# Altium PCB fab.PcbDoc
Units mm, origin at the board's own origin, x right, y up, seen from the top; angles counter-clockwise.
Board outline 43 x 16.25 mm, 2 copper layers (Top Layer, Bottom Layer); 20 components, 19 nets, 93 pads, 14 vias.
Unrouted connection lines stored in the file: 2.
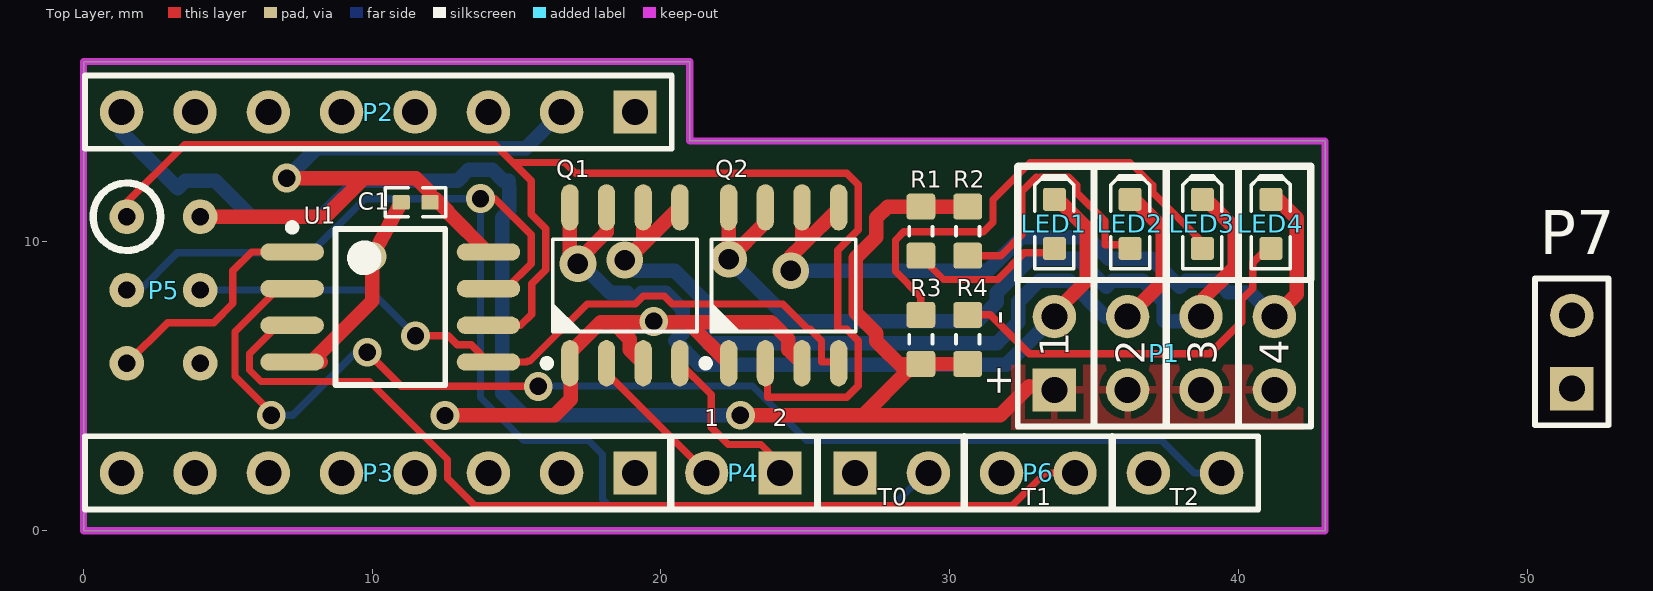
[diagram p0: Top Layer view]
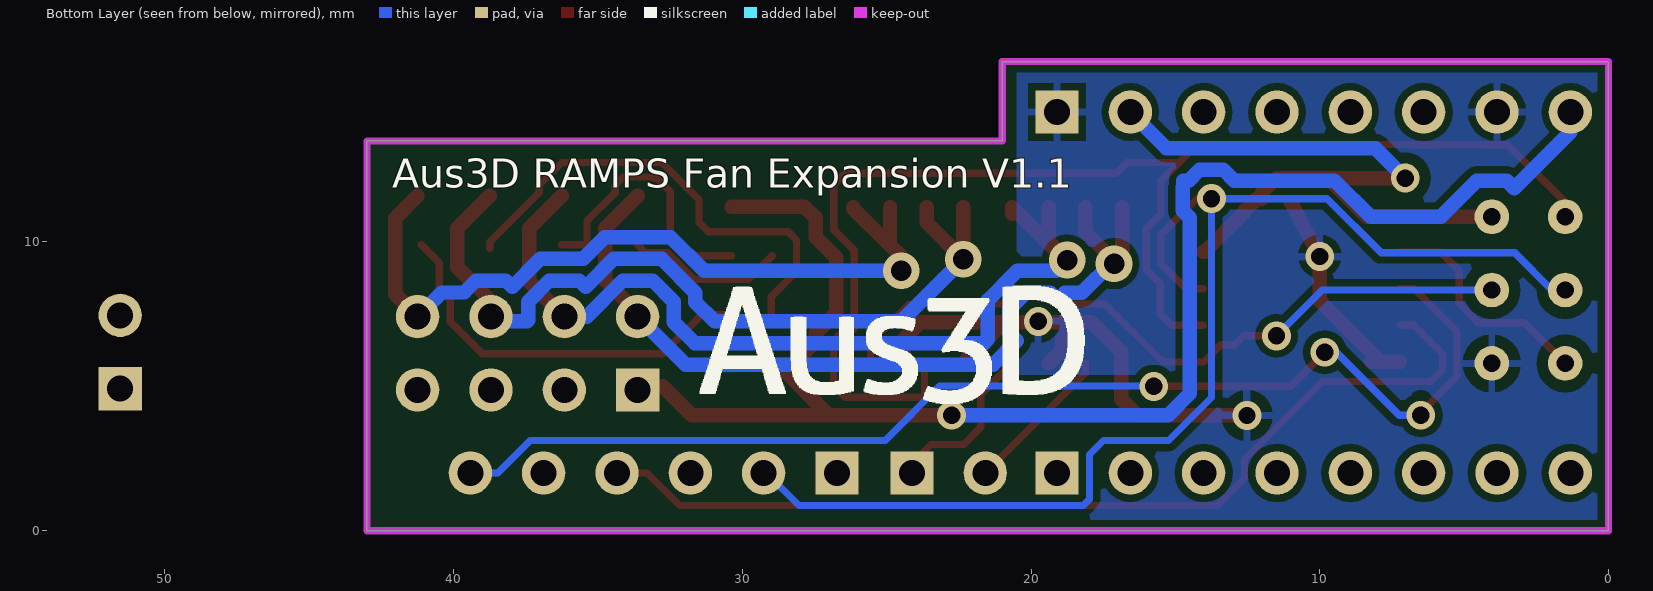
[diagram p1: Bottom Layer view, seen from below]
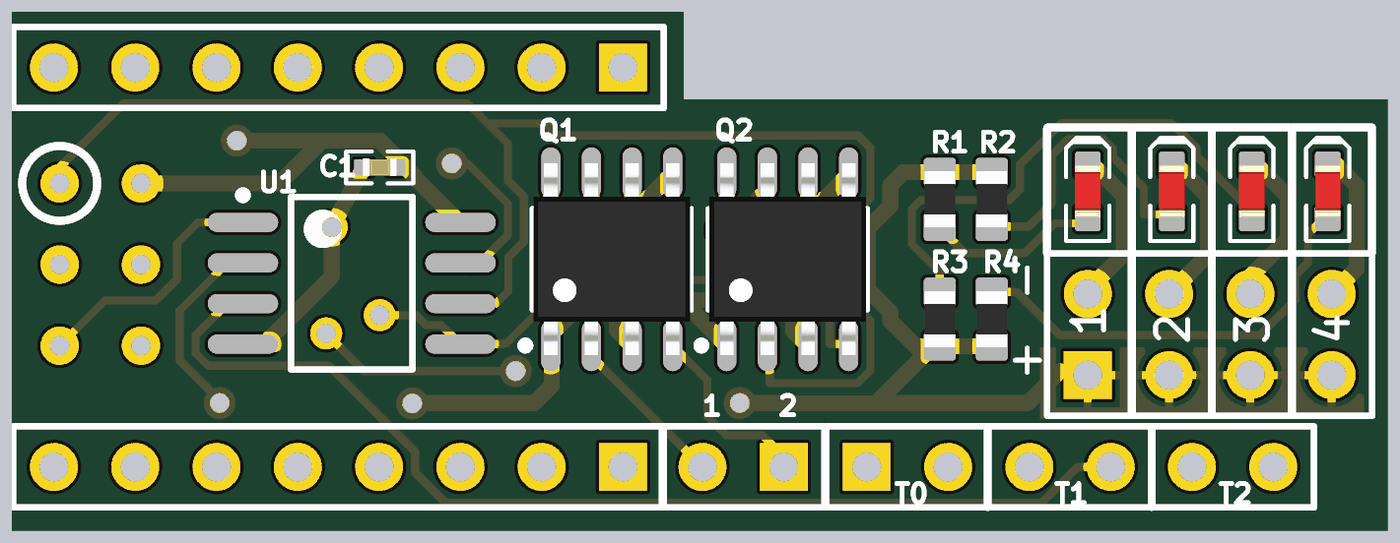
[diagram p2: 3D render of the assembled board from above, using the file's embedded part models]

## Layer stack, top to bottom
Top Solder: solder mask 0.0102, Solder Resist, Dk 3.5
Top Layer: signal copper 0.0356
Dielectric1: dielectric 0.32, FR-4, Dk 4.8
Bottom Layer: signal copper 0.0356
Bottom Solder: solder mask 0.0102, Solder Resist, Dk 3.5

## Board outline
0,0 43,0 43,13.5 21,13.5 21,16.25 0,16.25

## Design rules (kind name [scope] priority, off if disabled: settings)
Clearance [All] p1: gap=0.25
ComponentClearance [All] p1: gap=0.25 collisioncheckmode=3 verticalgap=0.254 showdistances=FALSE
FabricationTestPointUsage TestPointUsage [All] p1: valid=0 allowmultiple=FALSE
FabricationTestpoint Testpoint [All] p1: side=3 testpointundercomponent=TRUE minsize=1.016 maxsize=2.54 preferedsize=1.524 minholesize=0 maxholesize=1.016 preferedholesize=0.813 testpointgrid=0.025 allowsidetop=TRUE allowsidebottom=TRUE usegrid=TRUE gridtolerance=0
PolygonConnect [All] p1: connectstyle=Relief reliefconductorwidth=0.25 reliefentries=4 polygonreliefangle="90 Angle" airgapwidth=0.25
RoutingVias [All] p1: holewidth=0.6 width=1 viastyle="Through Hole" minholewidth=0.6 minwidth=1 maxholewidth=0.6 maxwidth=1
SilkToSolderMaskClearance SilkscreenOverComponentPads [IsPad] p1: minsilkscreentomaskgap=0.254 clearancetoexposedcopper=TRUE
SolderMaskExpansion [All] p1: expansion=0.102
Width Width_Power [(InNet('5V') OR InNet('12V') OR InNet('GND') OR InNet('FAN1') OR InNet('FAN2') OR InNet('FAN3') OR InNet('FAN4'))] p1: maxlimit=0.5 minlimit=0.5 preferedwidth=0.5
Width [All] p2: maxlimit=0.254 minlimit=0.254 preferedwidth=0.254
26 further rules are at their usual default settings.

## Components (designator, comment, footprint, x,y, rotation, side; value= is the part's Value field where it differs from the comment)
C1 "100n" CAPC1005X55N 11.5,11.375 r0 top
LED1 "Red" LED-0603-RED 33.625,10.625 r90 top
LED2 "Red" LED-0603-RED 36.25,10.625 r90 top
LED3 "Red" LED-0603-RED 38.75,10.625 r90 top
LED4 "Red" LED-0603-RED 41.125,10.625 r90 top
P1 "Fans" HDR2X4 33.625,4.875 r0 top
P2 "Header 8" HDR1X8 19.1,14.5 r180 top
P3 "Header 8" HDR1X8 19.1,2 r180 top
P4 "Header 2" HDR1X2 24.125,2 r180 top
P5 "ICSP" "ICSP Pads" 1.5,10.875 r0 top
P6 "Thermistor Pins" HDR1X6 26.72,2 r0 top
P7 "12V AUX" HDR1X2 51.547,4.921 r90 top
Q1 "MOSFET_AO4818B" SOIC127P600X175-8AN 18.75,8.5 r90 top
Q2 "MOSFET_AO4818B" SOIC127P600X175-8AN 24.25,8.5 r90 top
R1 "Thick Film" RESC1608X55N 29,10.375 r270 top
R2 "Thick Film" RESC1608X55N 30.625,10.375 r270 top
R3 "Thick Film" RESC1608X55N 29,6.625 r90 top
R4 "Thick Film" RESC1608X55N 30.625,6.625 r90 top
U1 "ATtiny45-20SU" 8S2_N 10.625,7.75 r0 top
? "Comment" AUS3D-LOGO-BACK 25.125,6.25 r0 top

## Footprints (in the part's own frame and the unit in brackets; to place one, negate y for a bottom-side part, rotate by r counter-clockwise, add the part's x,y. Pads: shape width x height; smd on the part's side, far side on the other; paste and mask are expansions set on the pad)
8S2_N [mm] "SOP, 8-Leads, Body 5.3x5.3mm, Pitch 1.27mm, IPC Medium Density"
  oval 2.2x0.6 smd: 1(-3.4,1.905) 2(-3.4,0.635) 3(-3.4,-0.635) 4(-3.4,-1.905) 5(3.4,-1.905) 6(3.4,-0.635) 7(3.4,0.635) 8(3.4,1.905)
  silkscreen extent -3.52,-2.7 1.9,2.88, body extent -2.7,-2.68 2.7,2.68, height 2.16
AUS3D-LOGO-BACK [mm]
CAPC1005X55N [mm] "Chip Capacitor, Body 1.0x0.5mm, EIA 0402, IPC Medium Density"
  round 0.2 on Mech15: 0(0,0)
  rrect20% 0.6x0.5 smd: 1(-0.5,0) 2(0.5,0)
  Top Layer pour cut-out: -0.325,0.375 -0.2,0.5 0.2,0.5 0.325,0.375 0.325,-0.375 0.2,-0.5 -0.2,-0.5 -0.325,-0.375
  silkscreen extent -1.05,-0.5 1.05,0.5, body extent -0.52,-0.27 0.53,0.28, height 0.55
HDR1X2 [mm] "Connector; Header; 2 Position"
  rect 1.5x1.5 hole 0.9: 1(0,0)
  round 1.5 hole 0.9: 2(2.54,0)
  silkscreen extent -1.27,-1.27 3.81,1.27
HDR1X6 [mm] "Connector; Header; 6 Position"
  rect 1.5x1.5 hole 0.9: 1(0,0)
  round 1.5 hole 0.9: 2(2.54,0) 3(5.08,0) 4(7.62,0) 5(10.16,0) 6(12.7,0)
  silkscreen extent -1.27,-1.27 13.97,1.27
HDR1X8 [mm] "Connector; Header; 8 Position"
  rect 1.5x1.5 hole 0.9: 1(0,0)
  round 1.5 hole 0.9: 2(2.54,0) 3(5.08,0) 4(7.62,0) 5(10.16,0) 6(12.7,0) 7(15.24,0) 8(17.78,0)
  silkscreen extent -1.27,-1.27 19.05,1.27
HDR2X4 [mm] "Connector; Header; 4x2 Position"
  rect 1.5x1.5 hole 0.9: 1(0,0)
  round 1.5 hole 0.9: 2(0,2.54) 3(2.54,0) 4(2.54,2.54) 5(5.08,0) 6(5.08,2.54) 7(7.62,0) 8(7.62,2.54)
  silkscreen extent -1.27,-1.27 8.89,3.81
"ICSP Pads" [mm]
  round 1.2 hole 0.6: 0(0,0) 1(2.54,0) 2(0,-2.54) 3(2.54,-2.54) 4(0,-5.08) 5(2.54,-5.08)
  silkscreen extent -1.17,-1.17 1.17,1.17
LED-0603-RED [mm]
  round 0.254 on Mech15: 0(0,0)
  rrect25% 0.8x0.8 smd: A(-0.85,0) K(0.85,0)
  Top Layer pour cut-out: -0.5,0.5 0.5,0.5 0.5,-0.5 -0.5,-0.5
  silkscreen extent -1.55,-0.67 1.68,0.67, body extent -0.8,-0.4 0.8,0.4, height 0.75
RESC1608X55N [mm] "Chip Resistor, Body 1.6x0.8mm, EIA 0603, IPC Medium Density"
  round 0.254 on Mech15: 0(0,0)
  rrect25% 0.9x1 smd: 1(-0.85,0) 2(0.85,0)
  Top Layer pour cut-out: -0.6,0.5 -0.4,0.7 0.4,0.7 0.6,0.5 0.6,-0.5 0.4,-0.7 -0.4,-0.7 -0.6,-0.5
  silkscreen extent -0.15,-0.41 0.15,0.41, body extent -0.87,-0.47 0.88,0.48, height 0.54
SOIC127P600X175-8AN [mm] "SOIC, 8-Leads, Body 4.9x3.9mm, Pitch 1.27mm, IPC Medium Density"
  round 1 on Mech15: 0(0,0)
  oval 1.6x0.6 smd: 1(-2.7,1.905) 2(-2.7,0.635) 3(-2.7,-0.635) 4(-2.7,-1.905) 5(2.7,-1.905) 6(2.7,-0.635) 7(2.7,0.635) 8(2.7,1.905)
  silkscreen extent -2.82,-2.5 1.6,2.82, body extent -3,-2.45 3,2.45, height 1.75

## Part data
C1: library part CAPC_100n_0402_X5R_16V_10%, "Capacitor SMD Cer 100nF 10% 16V X5R 0402"
LED1 LED2 LED3 LED4: library part LED_SMD_Red_0603_220mcd, "LED 0603 SMD Hyper Red 630nm 220mcd 20mA"
P1: library part "Header 4X2", "Header, 4-Pin, Dual row"
P2 P3: "Header, 8-Pin"
P4: "Header, 2-Pin"
P5: library part "Header 3X2", "Header, 3-Pin, Dual row"
P6: library part "Header 6", "Header, 6-Pin"
P7: library part "Header 2", "Header, 2-Pin"
Q1 Q2: "MOSFET Dual-Channel 30V 8.5A SOIC-8 SMD"
R1 R2 R3 R4: library part RES_330R_0603_5%, "Resistor SMD chip 330 Ohm 0.1W 5% 0603"
U1: "8-bit AVR Microcontroller, 20MHz, 2.7-5.5V, 4K Flash, 256 Bytes EEPROM, 256 Bytes SRAM, Industrial Grade (-40°C to 85°C), 8-Lead SOIC, Pb-Free"

## Via types
v1: diameter 1, hole 0.6, Top Layer to Bottom Layer, tented both sides, 7 vias
v2: diameter 1.27, hole 0.711, Top Layer to Bottom Layer, 4 vias
v3: diameter 1, hole 0.6, Top Layer to Bottom Layer, 3 vias

## Nets (pads, with @x,y where several pads share a name; then routed paths per layer and width w, separated by ;. In a path a pad name is that pad's centre, name@x,y a point inside that pad or via, vN(x,y) a via of type N, cw(c..) or ccw(c..) an arc to the next point about the centre after c; other vN are vias at no path point)
5V: C1.2 P2.2 P5.1 U1.8 | length 25
  Top Layer w0.5: P5.1@3.915,10.875 8.375,10.875 9.713,12.213 ; v1(7.037,12.213) 9.713,12.213 ; U1.8 13.99,9.655 12.615,11.03 12.615,11.065 12.18,11.5 12,11.5 12,11.728 11.515,12.213 9.713,12.213
  Bottom Layer w0.5: v1(7.037,12.213) 8.074,13.25 15.31,13.25 P2.2
12V: P1.1 P1.3 P1.5 P1.7 P2.8 P7.1 R1.1 R2.1 R3.1 R4.1 | length 56.5
  Top Layer w0.5: v1(22.75,4) 24.341,4 24.345,3.996 27,3.996 ; 28.25,5.775 R4.1@30.375,5.775 ; R2.1@30.375,11.225 27.85,11.225 27.459,10.834 27.459,10.16 26.75,9.451 26.75,7.549 27.459,6.84 27.459,6.566 28.512,5.512 27,4 31.75,4 32.75,5
  Bottom Layer w0.5: P2.8 1.32,13.805 3.261,11.864 3.522,12.125 4.558,12.125 5.808,10.875 8.238,10.875 9.49,12.127 12.963,12.127 13.336,12.5 14.164,12.5 14.537,12.127 14.728,12.127 14.728,11.936 14.75,11.914 14.75,11.086 14.499,10.834 14.499,4.751 15.25,4 16.164,4 v1(22.75,4)
FAN1: LED1.K P1.2 Q1.7 Q1.8 | length 29.4
  Top Layer w0.5: v2@16.845,9.28 Q1.8 ; v2(17.125,9.25) 17.125,9.355 18.115,10.345 Q1.7 ; P1.2 33.625,7.54 34.75,8.665 34.75,10.475 LED1.K@33.625,11.6
  Bottom Layer w0.5: v2(17.125,9.25) 17.125,9.355 18.24,8.24 18.824,8.24 19.075,7.989 19.336,8.25 20.164,8.25 20.75,7.664 20.75,6.836 20.489,6.575 21.315,5.75 31.96,5.75 P1.2
FAN1_PWM: P4.2 Q1.2 | length 5.2
  Top Layer w0.254: Q1.2 18.115,5.47 P4.2
FAN2: LED2.K P1.4 Q1.5 Q1.6 | length 31.4
  Top Layer w0.5: Q1.6 19.385,10.01 v2(18.75,9.375) 18.83,9.375 Q1.5 Q1.5@20.655,10.97 ; P1.4 37.375,8.625 37.375,10.475 LED2.K@36.25,11.6
  Bottom Layer w0.5: v2(18.75,9.375) 19.125,9 20.475,9 21.5,7.975 21.5,6.625 21.625,6.5 31.649,6.5 32.375,7.226 32.375,7.933 33.107,8.665 34.143,8.665 35.393,7.415 P1.4
FAN2_PWM: P4.1 Q1.4 | length 5.9
  Top Layer w0.254: Q1.4 21.738,4.717 21.738,3.581 22.331,2.988 23.467,2.988 24.125,2.33 P4.1
FAN3: LED3.K P1.6 Q2.7 Q2.8 | length 29.1
  Top Layer w0.5: Q2.8 v2(22.345,9.405) 23.615,10.675 Q2.7 ; P1.6 38.705,7.955 39.875,9.125 39.875,10.475 LED3.K@38.75,11.6
  Bottom Layer w0.5: v2(22.345,9.405) 24.5,7.25 30.96,7.25 31.625,7.915 31.625,8.243 32.797,9.415 34.453,9.415 35.425,8.443 35.647,8.665 36.683,8.665 37.415,7.933 37.415,7.291 37.456,7.25 38.54,7.25 P1.6
FAN3_PWM: P5.0 Q2.2 U1.6 | length 47
  Top Layer w0.254: P5.0@1.375,10.875 1.375,11.25 3.498,13.373 4.327,13.373 4.329,13.375 5.931,13.375 5.933,13.373 6.867,13.373 6.869,13.375 8.471,13.375 8.473,13.373 9.407,13.373 9.409,13.375 11.011,13.375 11.013,13.373 11.947,13.373 11.949,13.375 13.551,13.375 13.553,13.373 14.252,13.373 15.504,12.121 15.504,10.959 16.006,10.457 16.006,9.043 15.52,8.557 15.52,7.5 15.135,7.115 U1.6 ; 14.873,12.752 16.663,12.752 17.038,12.377 26.435,12.377 26.832,11.98 26.832,10.42 26.123,9.711 26.123,7.015 26.161,6.977 26.435,6.977 26.832,6.58 26.832,5.02 26.435,4.623 25.875,4.623 25.871,4.627 25.169,4.627 25.165,4.623 24.605,4.623 24.601,4.627 23.688,4.627 Q2.2@23.688,5.727
FAN4: LED4.K P1.8 Q2.5 Q2.6 | length 27.6
  Top Layer w0.5: v2(24.5,9) 24.5,9.5 24.885,9.885 ; Q2.6 24.885,9.885 ; Q2.5 26.155,11.155 24.885,9.885 ; P1.8 42.025,8.195 42.025,10.825 LED4.K@41.25,11.6
  Bottom Layer w0.5: v2(24.5,9) 31.321,9 32.486,10.165 34.764,10.165 35.514,9.415 36.993,9.415 37.965,8.443 38.187,8.665 39.223,8.665 39.638,8.25 40.41,8.25 P1.8
FAN4_PWM: P5.3 Q2.4 U1.5 | length 25.5
  Top Layer w0.254: v3(11.5,6.75) 12.633,6.75 12.945,6.438 13.432,6.438 U1.5 15.355,5.845 15.387,5.877 15.465,5.877 17.442,7.855 19.114,7.855 19.387,8.127 20.113,8.127 20.386,7.855 24.214,7.855 25.092,6.977 25.165,6.977 25.562,6.58 25.562,5.845 26.11,5.845 Q2.4
  Bottom Layer w0.254: P5.3 9.915,8.335 v3(11.5,6.75)
GND: C1.1 P2.1 P2.7 P5.5 P7.2 Q1.1 Q1.3 Q2.1 Q2.3 U1.4 | length 27.7
  Top Layer w0.5: U1.4@8.22,5.845 U1.4 7.886,5.845 10,7.959 v3(10,9.5) C1.1 ; v1(12.517,3.988) 12.512,3.988 12.5,4 16.323,4 16.875,4.552 16.875,6.191 17.911,7.228 18.319,7.228 ; Q1.3 18.915,6.27 18.915,6.631 18.319,7.228 ; Q2.1 20.918,7.228 ; Q2.3 24.415,6.27 24.415,6.631 23.819,7.228 20.918,7.228 ; 18.319,7.228 20.918,7.228
  other v1: 19.75,7.25
NetLED1_A: LED1.A R1.2 | length 5.5
  Top Layer w0.254: R1.2@28.958,9.525 29.785,8.698 31.661,8.698 32.588,9.625 33.35,9.625 LED1.A@33.625,9.9
NetLED2_A: LED2.A R2.2 | length 9.5
  Top Layer w0.254: R2.2@30.375,9.525 31.775,9.525 32.5,10.25 32.5,11.75 33.002,12.252 33.025,12.252 33.076,12.201 33.127,12.252 34.123,12.252 34.402,11.973 34.402,11.71 35.377,10.735 35.377,9.9 LED2.A@36.25,9.9
NetLED3_A: LED3.A R3.2 | length 16.7
  Top Layer w0.254: R3.2 29,8.108 28.123,8.985 28.123,10.065 28.41,10.352 31.169,10.352 31.502,10.685 31.502,11.464 32.794,12.756 36.244,12.756 37.027,11.973 37.027,11.723 38.75,10 LED3.A
NetLED4_A: LED4.A R4.2 | length 13.8
  Top Layer w0.254: R4.2@30.375,7.475 31.4,7.475 32.75,6.125 38.236,6.125 38.238,6.127 39.011,6.127 40.118,7.234 40.118,8.007 40.502,8.391 40.502,9.277 LED4.A@41.125,9.9
RESET: P5.4 U1.1 | length 8
  Top Layer w0.254: P5.4 2.913,7.208 4.507,7.208 5.167,7.868 5.167,9.001 5.821,9.655 U1.1
SCK: P5.2 P6.2 U1.7 | length 43.9
  Top Layer w0.254: v1(13.75,11.5) 14.25,11.5 15.502,10.248 15.502,9.252 14.635,8.385 U1.7
  Bottom Layer w0.254: P5.2 1.96,8.335 3.25,9.625 7.875,9.625 9.75,11.5 v1(13.75,11.5) 13.75,4.613 15.24,3.123 16.089,3.123 16.093,3.127 17.027,3.127 17.031,3.123 17.49,3.123 17.973,2.64 17.973,1.094 18.194,0.873 28.038,0.873 P6.2@29.165,2
THERM1: P6.4 U1.3 | length 33.7
  Top Layer w0.254: U1.3 6.738,7.115 5.748,6.125 5.748,5.565 6.145,5.168 9.906,5.168 12.607,2.467 12.607,1.819 13.553,0.873 32.172,0.873 33.299,2 P6.4@34.245,2
THERM2: P6.6 U1.2 | length 41.2
  Top Layer w0.254: v1(6.5,4) 6.5,4.094 5.244,5.35 5.244,6.891 6.738,8.385 U1.2 ; v3(9.826,6.18) 11.006,5 v1(15.75,5)
  Bottom Layer w0.254: v1(6.5,4) 7.25,4 9.43,6.18 v3(9.826,6.18) ; v1@16.012,5.012 23.169,5.012 25.054,3.127 37.347,3.127 38.474,2 P6.6@39.325,2
pads on no net: C1.0 LED1.0 LED2.0 LED3.0 LED4.0 P2.3 P2.4 P2.5 P2.6 P3.1 P3.2 P3.3 P3.4 P3.5 P3.6 P3.7 P3.8 P6.1 P6.3 P6.5 Q1.0 Q2.0 R1.0 R2.0 R3.0 R4.0

## Polygon pours and split planes (outlines as drawn)
GND on Bottom Layer "GND Pour" (solid, remove dead copper, pour order 6): 0.25,16 0.25,0.25 20.5,0.25 20.5,3.25 20.5,16
12V on Top Layer "VCC - TopLayer" (solid, pour order 8): 42.25,5.75 32.125,5.75 32.125,3.5 42.25,3.5

## Keep-outs
Keep-Out Layer:
  the board outline again, w0.254

## Silkscreen, mask and mechanical layers (free items; w line width, h text height)
Top Overlay:
  lines w0.254: 30.5,0.75 30.5,3.25 ; 32.355,8.685 32.355,12.605 32.375,12.625 42.5,12.625 42.5,8.7 ; 35,3.625 35,12.625 ; 35.625,0.75 35.625,3.25 ; 37.5,3.625 37.5,12.625 ; 40,3.625 40,12.625
  text "-" at 32.125,7.125 h1 r90
  text "1" at 34.125,6 h1 r90
  text "2" at 36.75,5.75 h1 r90
  text "3" at 39.25,5.75 h1 r90
  text "4" at 41.75,5.75 h1 r90
  text "+" at 32.125,4.625 h1 r90
  text "1" at 21.5,3.625 h0.6
  text "2" at 23.875,3.625 h0.6
  text "T0" at 27.5,0.875 h0.6
  text "T1" at 32.5,0.875 h0.6
  text "T2" at 37.625,0.875 h0.6
Bottom Overlay:
  text "Aus3D RAMPS Fan Expansion V1.1" at 42.125,11.875 h1
Mechanical 16:
  drawing of 1874 lines, arcs and shapes, not listed
  text "1" at -98.754,84.611 h1.78
  text "2" at -26.11,84.611 h1.78
  text "3" at 47.042,84.611 h1.78
  text "4" at 119.94,84.611 h1.78
  text "A" at -133.095,61.599 h1.78
  text "A" at 153.925,61.599 h1.78
  text "B" at -133.095,13.542 h1.78
  text "B" at 153.925,13.542 h1.78
  text "C" at -133.095,-34.972 h1.78
  text "C" at 153.925,-34.972 h1.78
  text "ENGINEER:" at 38.99,-71.98 h1.14
  text "TITLE:" at 77.09,-71.98 h1.14
  text "PCB DESIGNER:" at 38.99,-79.473 h1.14
  text "D" at -133.095,-82.978 h1.78
  text "D" at 153.925,-82.978 h1.78
  text "DATE:" at 38.99,-87.22 h1.14
  text "PART NO.:" at 77.09,-87.22 h1.14
  text "REV:" at 130.43,-87.22 h1.14
  text "Altium Limited" at 5.97,-89.76 h1.78
  text ".PRINT_DATE" at 40.26,-90.268 h1.78
  text "12a Rodborough Rd" at 5.97,-92.3 h1.78
  text "Frenchs Forest" at 5.97,-94.84 h1.78
  text "FILE NAME:" at 38.99,-94.84 h1.14
  text "DWG NO:" at 77.09,-94.84 h1.14
  text "SCALE:" at 130.43,-94.84 h1.14
  text "NSW 2086" at 5.97,-97.38 h1.78
  text ".PCB_FILE_NAME_NO_PATH" at 40.26,-97.888 h1.78
  text "1" at -98.754,-103.349 h1.78
  text "2" at -26.11,-103.349 h1.78
  text "3" at 47.042,-103.349 h1.78
  text "4" at 119.94,-103.349 h1.78